# Altium PCB PCB1.PcbDoc
Units mil, origin at the board's own origin, x right, y up, seen from the top; angles counter-clockwise.
Board outline 5100 x 600 mil, 4 copper layers (Top Layer, GND, VCC, Bottom Layer), stack 23.756 mil thick; 26 components, 23 nets, 106 pads, 35 vias.
Unrouted connection lines stored in the file: 5.
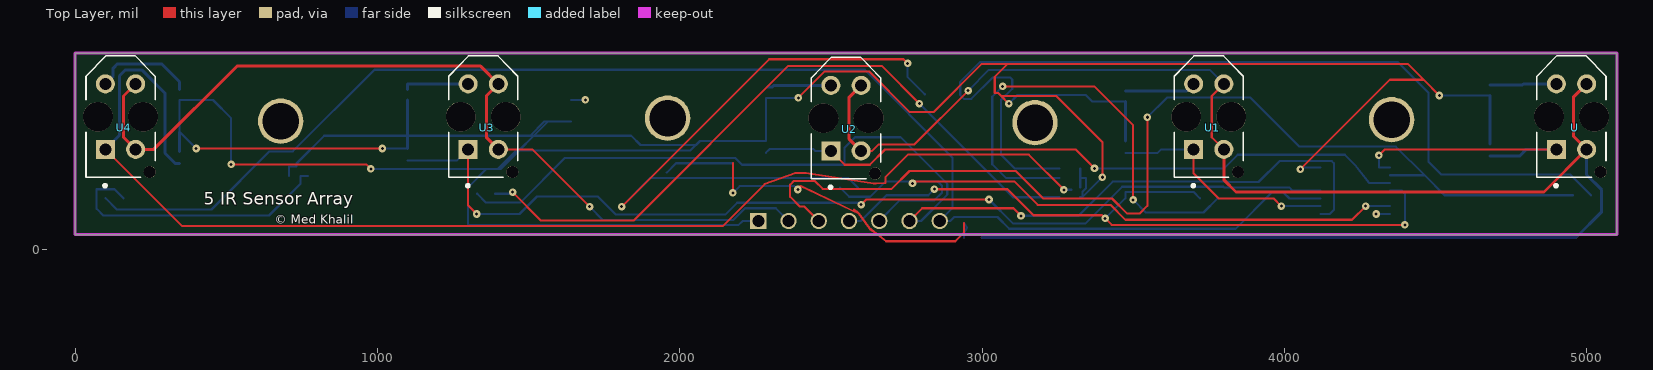
[diagram p0: Top Layer view]
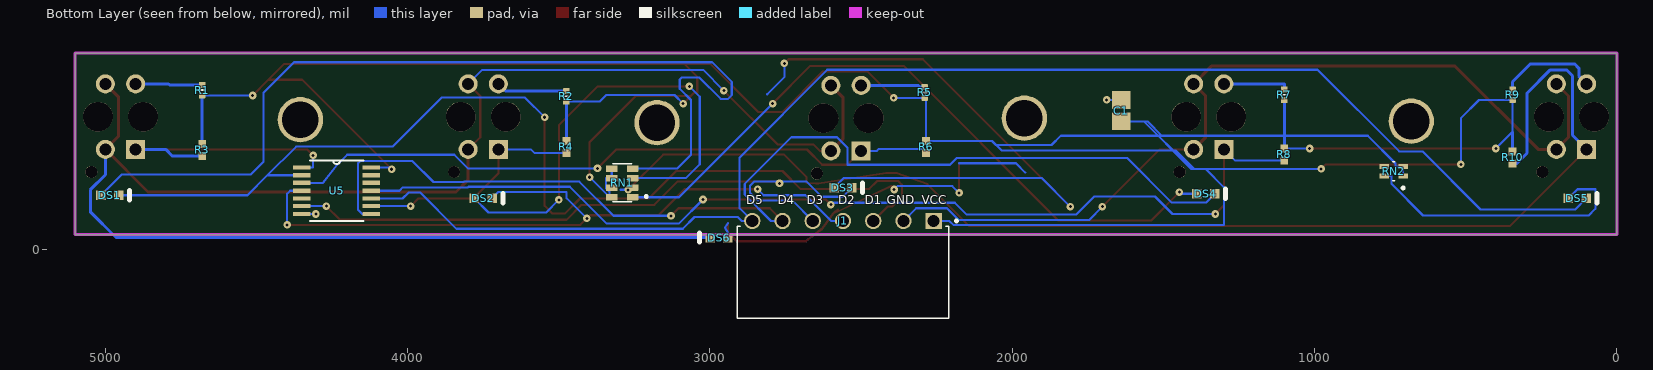
[diagram p1: Bottom Layer view, seen from below]
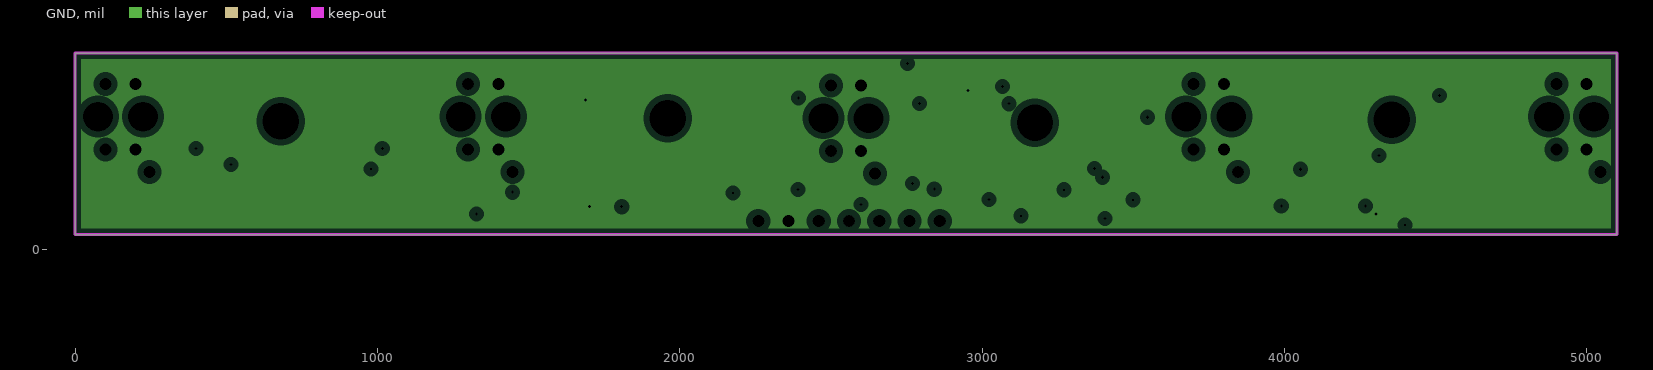
[diagram p2: GND, clearances drawn from the general rule]
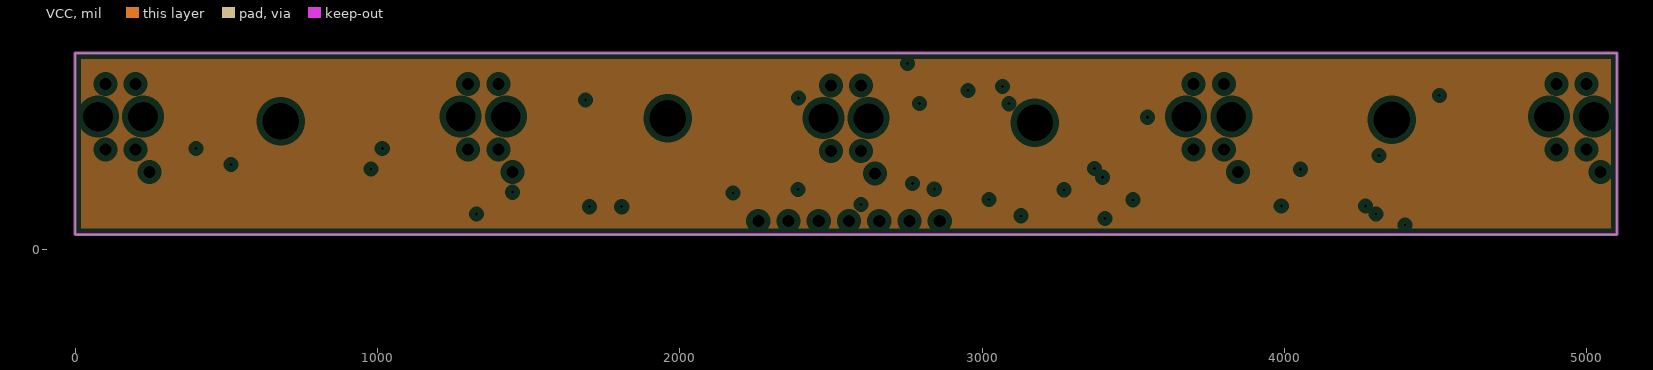
[diagram p3: VCC, clearances drawn from the general rule]
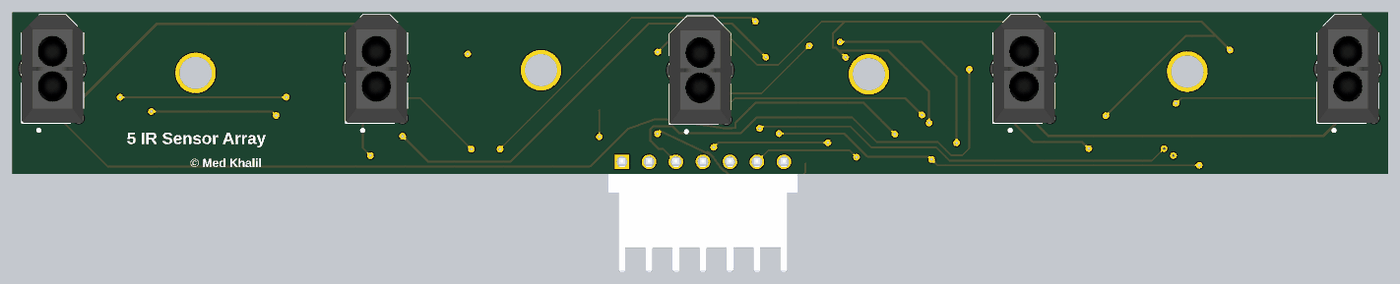
[diagram p4: 3D render of the assembled board from above, using the file's embedded part models]
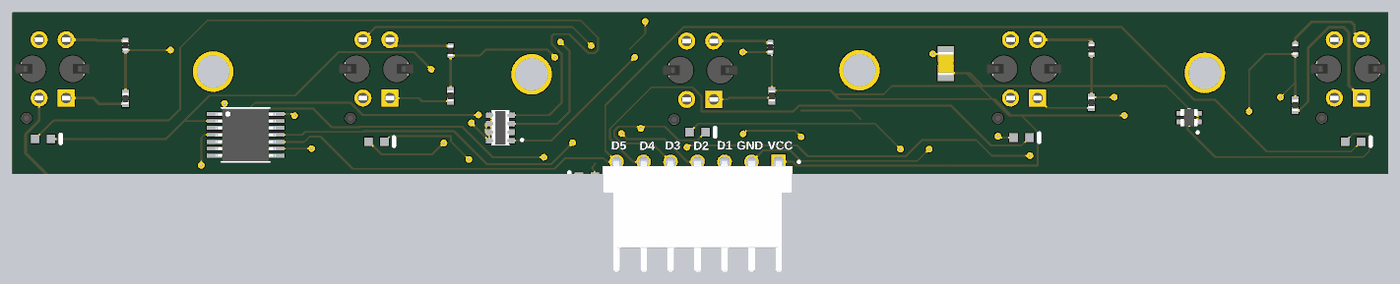
[diagram p5: 3D render of the assembled board from below, using the file's embedded part models]

## Layer stack, top to bottom
Top Solder: solder mask 0.4, Solder Resist, Dk 3.5
Top Layer: signal copper 1.4
Dielectric 2: prepreg 2.8, PP-006, Dk 4.1
GND: plane copper 1.378, net GND
Dielectric 1: dielectric 12.6, FR-4, Dk 4.8
VCC: plane copper 1.378
Dielectric 3: prepreg 2.8, PP-006, Dk 4.1
Bottom Layer: signal copper 1.4
Bottom Solder: solder mask 0.4, Solder Resist, Dk 3.5

## Board outline
0,50 0,650 5100,650 5100,50

## Design rules (kind name [scope] priority, off if disabled: settings)
Clearance [All] p1: gap=10 ignorepadtopadclearanceinfootprint=FALSE
PlaneClearance [All] p1: clearance=20
PlaneConnect [All] p1: planeconnectstyle=Relief reliefexpansion=20 reliefentries=4 reliefconductorwidth=10 reliefairgap=10
PolygonConnect [All] p1: connectstyle=Relief reliefconductorwidth=10 reliefentries=4 polygonreliefangle="90 Angle" airgapwidth=10
RoutingVias [All] p1: holewidth=10 width=25 viastyle="Through Hole" minholewidth=10 minwidth=25 maxholewidth=10 maxwidth=25
SolderMaskExpansion [All] p1: expansion=4 istentingtop=FALSE
SupplyNets "Schematic Supply Nets_1" [InNet('GND')] p1: voltage=0.000
SupplyNets "Schematic Supply Nets" [InNet('VCC')] p2: voltage=0.000
Width [All] p1: maxlimit=7 minlimit=7 preferedwidth=7 minimp=50.000000 maximp=50.000000 favimp=50.000000
28 further rules are at their usual default settings.

## Components (designator, comment, footprint, x,y, rotation, side; value= is the part's Value field where it differs from the comment)
C1 "Capacitor 1 uF +/- 10% 25 V 0805" CAPC2013X145X50ML20T25 1640,460 r270 bottom value=1µF
DS1 "HSMG-C190" AVAG-HSMX-C190_V 4985,180 r180 bottom
DS2 "HSMG-C190" AVAG-HSMX-C190_V 3750,170 r180 bottom
DS3 "HSMG-C190" AVAG-HSMX-C190_V 2560,205 r180 bottom
DS4 "HSMG-C190" AVAG-HSMX-C190_V 1359.53,185 r180 bottom
DS5 "HSMG-C190" AVAG-HSMX-C190_V 130.47,170 r180 bottom
DS6 "HSMG-C190" AVAG-HSMX-C190_V 2970,40 r0 bottom
J1 "640457-7" TE_640457-7 2260,95 r0 bottom (schematic designator J?)
R1 "Resistor 100R +/-1 % 0402 63 mW" RESC0402(1005)_L 4680,527.72 r90 bottom value=100
R2 "Resistor 100R +/-1 % 0402 63 mW" RESC0402(1005)_L 3475,507.28 r90 bottom value=100
R3 "Resistor 100k +/-1% 0402 63 mW" RESC1005X40X25ML05T05 4680,329.68 r90 bottom value=100k
R4 "Resistor 100k +/-1% 0402 63 mW" RESC1005X40X25ML05T05 3475,339.68 r90 bottom value=100k
R5 "Resistor 100R +/-1 % 0402 63 mW" RESC0402(1005)_L 2290,520 r90 bottom value=100
R6 "Resistor 100k +/-1% 0402 63 mW" RESC1005X40X25ML05T05 2285,339.68 r90 bottom value=100k
R7 "Resistor 100R +/-1 % 0402 63 mW" RESC0402(1005)_L 1100,512.28 r90 bottom value=100
R8 "Resistor 100k +/-1% 0402 63 mW" RESC1005X40X25ML05T05 1100,315 r90 bottom value=100k
R9 "Resistor 100R +/-1 % 0402 63 mW" RESC0402(1005)_L 345,512.72 r90 bottom value=100
R10 "Resistor 100k +/-1% 0402 63 mW" RESC1005X40X25ML05T05 345,305 r90 bottom value=100k
RN1 "742C083561JP" RESCAV80P320X160X70-8N 3290.55,220.75 r90 bottom
RN2 "EXB-U346R2JV" RESCAXE_EXB-U346R2JV 738.5,259.25 r90 bottom
U "TCRT5000L" XDCR_TCRT5000L 4950,440 r90 top
U1 "TCRT5000L" XDCR_TCRT5000L 3750,440 r90 top
U2 "TCRT5000L" XDCR_TCRT5000L 2550,435 r90 top
U3 "TCRT5000L" XDCR_TCRT5000L 1350,440 r90 top
U4 "TCRT5000L" XDCR_TCRT5000L 150,440 r90 top
U5 "74HC14PW,112" SOP65P640X110-14N 4235,195 r180 bottom

## Footprints (in the part's own frame and the unit in brackets; to place one, negate y for a bottom-side part, rotate by r counter-clockwise, add the part's x,y. Pads: shape width x height; smd on the part's side, far side on the other; paste and mask are expansions set on the pad)
AVAG-HSMX-C190_V [mm] "SMD, 2-Leads, Body 1.6x0.8mm, Height 0.9mm"
  rect 0.8x0.8 smd: 1(-0.75,0) 2(0.75,0)
  silkscreen extent 1.65,-0.4 1.65,0.4, body extent -0.8,-0.4 0.8,0.4, height 0.9
CAPC2013X145X50ML20T25 [mm] "Chip Capacitor, 2-Leads, Body 2.2x1.45mm, IPC Low Density"
  rect 1.5x1.55 smd: 1(-0.9,0) 2(0.9,0)
  body extent -1.1,-0.72 1.1,0.73, height 1.45
RESC0402(1005)_L [mm] "Chip Resistor, Body 1.0x0.5mm, IPC High Density"
  rrect25% 0.5x0.55 smd: 1(-0.45,0) 2(0.45,0)
  silkscreen extent 0,-0.2 0,0.2, body extent -0.5,-0.25 0.5,0.25, height 0.3
RESC1005X40X25ML05T05 [mm] "Chip Resistor, 2-Leads, Body 1.05x0.55mm, IPC Low Density"
  rect 0.65x0.65 smd: 1(-0.5,0) 2(0.5,0)
  body extent -0.53,-0.28 0.53,0.28, height 0.4
RESCAV80P320X160X70-8N [mm]
  rrect13% 0.53x0.97 smd: 1(-1.2,-0.875) 2(-0.4,-0.875) 3(0.4,-0.875) 4(1.2,-0.875) 5(1.2,0.875) 6(0.4,0.875) 7(-0.4,0.875) 8(-1.2,0.875)
  silkscreen extent -1.6,-2.13 1.6,0.8, body extent -1.6,-0.8 1.6,0.8, height 0.7
RESCAXE_EXB-U346R2JV [mm]
  rect 0.45x0.8 smd: 1(-0.4,-0.8) 2(0.4,-0.8) 3(0.4,0.8) 4(-0.4,0.8)
  silkscreen extent -1.5,-0.9 0.8,0.09, body extent -0.8,-0.8 0.8,0.8, height 0.6
SOP65P640X110-14N [mil]
  rect 58x14 smd: 1(-115,77) 2(-115,51) 3(-115,26) 4(-115,0) 5(-115,-26) 6(-115,-51) 7(-115,-77) 8(115,-77) 9(115,-51) 10(115,-26) 11(115,0) 12(115,26) 13(115,51) 14(115,77)
  silkscreen extent -89,-100 89,100, body extent -126,-98 126,98, height 38
TE_640457-7 [mm]
  rect 1.37x1.37 hole 1.02: 1(0,0)
  round 1.37 hole 1.02: 2(2.54,0) 3(5.08,0) 4(7.62,0) 5(10.16,0) 6(12.7,0) 7(15.24,0)
  silkscreen extent -2.02,-0.1 16.51,8.19, body extent -1.27,-0.38 16.51,10.43, height 6.11
XDCR_TCRT5000L [mm]
  rect 1.6x1.6 hole 1: 1(-2.75,1.27)
  round 1.6 hole 1: 2(-2.75,-1.27) 3(2.75,-1.27) 4(2.75,1.27)
  round 1 hole 1 unplated: ""(-4.65,-2.45)
  round 2.5 hole 2.5 unplated: ""(0,1.9) ""(0,-1.9)
  silkscreen extent -5.92,-2.9 5.1,2.9, body extent -5.1,-3.5 5.1,3.5, height 6.71

## Part data
C1: library part CMP-001-00010-6, "Chip Capacitor, 1 uF, +/-10%, 25 V, 0805 (2012 Metric)", Capacitor Type=Ceramic, Case/Package=0805, Max Operating Temperature=125°C, Min Operating Temperature=-55°C, Tolerance=10%, Voltage Rating=25V, Mounting Technology=SM, Pins=2, RoHS Compliant=True
DS1 DS2 DS3 DS4 DS5 DS6: library part CMP-007-00013-2, "LED Uni-Color Green, 52 mW, 20 mA, -40 to 85 degC, 2-Pin SMD, RoHS, Tape and Reel", Case/Package=0603, Colour=Green, Forward Current=20mA, Forward Voltage=2.2V, Manufacturer=Avago, Max Operating Temperature=85°C, Min Operating Temperature=-40°C, Package Description="2-Pin Surface Mount Device, Body 1.6 x 0.8 mm, Height 0.9 mm", Package Quantity=4000, Package Reference=HSMX-C190, Power=52mW, Datasheet URL=http://docs.avagotech.com/docs/AV02-0551EN, Datasheet Version=Mar-12, Illumination Colour=Green, Lens Style=Diffused, Luminous Intensity=15mcd, Manufacturer URL=http://www.avagotech.com/, Mounting Technology=SM, Nominal Vf=2.2V, Packaging=TapeandReel, Pins=2, RoHS Compliant=True, Viewing Angle=170degrees
J1: "07P MTA100 HDR ASSY SQ R/A F/L", Package=None, Availability=Good, Centerline_Pitch="2.54 mm[.1 in]", Check_prices=https://www.snapeda.com/parts/640457-7/TE%20Connectivity%20AMP%20Connectors/view-part/554536/?ref=eda, EU_RoHS_Compliance=Compliant, MF="TE Connectivity", MP=640457-7, Number_of_Positions=7, Price=None, Product_Type=Connector, Purchase-URL=https://pricing.snapeda.com/search/part/640457-7/?ref=eda, SnapEDA_Link=https://www.snapeda.com/parts/640457-7/TE%20Connectivity%20AMP%20Connectors/view-part/554536/?ref=snap
R1 R2 R5 R7 R9: library part CMP-009-00167-3, "Chip Resistor, 100 Ohms, +/-1 %, 63 mW, -55 to 155 degC, 0402", Case/Package=0402, Max Operating Temperature=155°C, Min Operating Temperature=-55°C, Power=63mW, Tolerance=1%, Pins=2
R3 R4 R6 R8 R10: library part CMP-009-00021-5, "Chip Resistor, 100 KOhm, +/- 1%, 0.063 W, -55 to 155 degC, 0402 (1005 Metric)", Case/Package=0402, Max Operating Temperature=155°C, Min Operating Temperature=-55°C, Power=63mW, Tolerance=1%, Voltage Rating=50V, Mounting Technology=SM, Pins=2, RoHS Compliant=True
RN1: "560 Ohm Â±5% 62.5mW Power Per Element Isolated Resistor Network/Array Â±200ppm/Â°C 1206 (3216 Metric), Concave, Long Side Terminals", Package="1206 CTS Resistor", Check_prices=https://www.snapeda.com/parts/742C083561JP/CTS+Components/view-part/?ref=eda, MF="CTS Resistor", MP=742C083561JP, SnapEDA_Link=https://www.snapeda.com/parts/742C083561JP/CTS+Components/view-part/?ref=snap
RN2: "Series/Type: Anti-Sulfurated Chip Resistor Array, Power Rating (W): 0.063, Chip Size (LxW) (mm): 1.6 X 1.6, Resistance Values (â„", Package="NON STANDARD-4 Panasonic", Check_prices=https://www.snapeda.com/parts/EXB-U346R2JV/Panasonic/view-part/?ref=eda, MF=Panasonic, MP=EXB-U346R2JV, SnapEDA_Link=https://www.snapeda.com/parts/EXB-U346R2JV/Panasonic/view-part/?ref=snap
U U1 U2 U3 U4: "Reflective Optical Sensor 0.591 _15mm_ PCB Mount", Package="PCB Mount Vishay Semiconductor", Availability=Unavailable, MF=Vishay, MP=TCRT5000L, Price=None, SnapEDA_Link=https://www.snapeda.com/parts/TCRT5000L/Vishay%20Semiconductor%20Opto%20Division/view-part/229608/?ref=snap
U5: "Inverter IC 6 Channel Schmitt Trigger 14-TSSOP", Package="TSSOP14-14 Nexperia USA Inc.", Availability=Good, Check_prices=https://www.snapeda.com/parts/74HC14PW,112/Nexperia/view-part/1039907/?ref=eda, MF=Nexperia, MP=74HC14PW,112, Price=None, Purchase-URL=https://pricing.snapeda.com/search/part/74HC14PW,112/?ref=eda, SnapEDA_Link=https://www.snapeda.com/parts/74HC14PW,112/Nexperia/view-part/1039907/?ref=snap

## Free pads (board coordinates)
  round 150 hole 120: 5(680,425) 5(1960,435) 5(3175,420) 5(4355,430)

## Via types
v1: diameter 25, hole 10, Top Layer to Bottom Layer, 35 vias

## Nets (pads, with @x,y where several pads share a name; then routed paths per layer and width w, separated by ;. In a path a pad name is that pad's centre, name@x,y a point inside that pad or via, vN(x,y) a via of type N, cw(c..) or ccw(c..) an arc to the next point about the centre after c; other vN are vias at no path point)
A1: R3.1 U5.1 U.1 | length 901
  Top Layer w7: v1(4313,311.73) 4333,331.73 U.1
  Bottom Layer w7: v1(4313,311.73) 4313,272 U5.1
  Bottom Layer w10: R3.1 4779,310 4800.73,331.73 U.1
A2: R6.1 U2.1 U5.3 | length 2200.3
  Top Layer w7: U2.1 2545.73,281 2628.75,281 2679.25,331.5 3309.5,331.5 v1(3372,269)
  Bottom Layer w7: R6.1 2298,333 2442,333 2448.27,326.73 U2.1 ; v1(3372,269) 3800.9,269 3845.9,314 4200,314 4235,279 4280,221 U5.3
A3: R10.1 U4.1 U5.5 | length 4185.8
  Top Layer w7: U4.1 353.73,78 2142,78 2280.69,216.69 2382.19,253 2417.81,253 2641.49,219.12 ; 2648.48,218.81 cw(c2646.46,251.93) 2641.49,219.12 ; v1(3271,198) 3154.5,314.5 2754.62,314.5 2681.05,240.93 2681.05,220.79 2678.4,220.63 2641.49,219.12
  Bottom Layer w7: v1(3271,198) 3295,198
  Bottom Layer w10: U4.1 147,378.73 147,575 166.76,594.76 220,594.76 297,517.76 297,319 330.68,285.32 R10.1
A4: R4.1 U1.1 U5.9 | length 774.3
  Top Layer w7: U1.1 3700,252 3783,169 3965,169 v1(3990,144)
  Bottom Layer w7: R4.1 3581,320 3592.73,331.73 U1.1 ; v1(3990,144) U5.9
A5: R8.1 U3.1 U5.11 | length 3396
  Top Layer w7: U3.1 1300,146 v1(1328,118) ; v1(2600,149) 2617,166 v1(3023,166)
  Bottom Layer w7: R8.1 1263.58,295.32 U3.1 ; v1(1328,118) 1470,118 1528,176 1729,176 1789,116 2151,116 2190,155 2594,155 v1(2600,149) ; v1(3023,166) 3103,86 3341.53,86 3463.53,208 3798,208 3800,206 4016,206 4027,195 U5.11
D1: DS1.2 J1.3 U5.2 | length 3435.7
  Top Layer w7: J1.3 2412,143 2397,143 2365,175 2365,215 2377,227 2447,227 2473,201 2701,201 2760,260 3112,260 3203,169 3430,169 3480,119 3521,119 3547,145 v1(3547,438)
  Bottom Layer w7: v1(3547,438) 3612,503 3888,503 4050,341 4369,341 4464,246 ; U5.2 4464,246 ; DS1.2 4530,180 4464,246
D2: DS2.2 J1.4 U5.4 | length 2457.6
  Top Layer w7: v1(2842,200) 3084.37,200 3170.37,114 3397,114 v1(3407.38,103.62) 3429.04,81.96 v1(4398.96,81.96)
  Bottom Layer w7: J1.4 2599,95 2684,180 2822,180 v1(2842,200) ; v1(3407.38,103.62) 3474,170.23 3474,191 3699.47,191 DS2.2 ; U5.4 4388.96,195 4398.96,185 v1(4398.96,81.96)
D3: DS3.2 J1.5 U5.6 | length 2307.1
  Top Layer w7: v1(2770,219) 2777,226 3106.34,226 3184.34,148 3425,148 3474,99 4224,99 v1(4269,144)
  Bottom Layer w7: DS3.2 2560.47,175 2630,175 2681,226 v1@2770,226 ; J1.5 2728,163 2841.77,163 2868,189.23 2868,210.77 2852.77,226 v1@2770,226 ; v1(2770,219) v1@2770,226 ; v1(4269,144) U5.6
D4: DS4.2 J1.6 U5.8 | length 3683.7
  Top Layer w7: J1.6 2802,137 3104,137 v1(3129,112)
  Bottom Layer w7: DS4.2 1359.25,155.75 1472.75,155.75 1620,303 2184,303 2206,281 2545,281 2545,337 2580,372 2730.81,372 2885,217.81 2885,182 2798,95 J1.6 ; v1(3129,112) 3319,112 3432,225 3813.74,225 3815,223.74 3914.74,223.74 3984,293 4157,293 4165,285 4165,133 4150,118 U5.8
D5: DS5.2 J1.7 U5.10 | length 4694.8
  Bottom Layer w7: DS5.2 137.94,133 451,133 643,325 720,325 990,595 2612,595 2902,305 2902,137 J1.7 2895,95 2908,108 3051,108 3090,69 3839.01,69 3959.01,189 3997,189 4017,169 U5.10
GND: C1.1 DS6.2 J1.2 U1.2 U1.3 U2.2 U2.3 U3.2 U3.3 U4.2 U4.3 U5.7 U.2 U.3 | length 8794.2
  Top Layer w7: U3.2 1512.27,331.73 v1(1702,142) ; U2.2 2636.34,326.73 2658.11,348.5 2776.5,348.5 v1(2954,526) ; U1.2 3760,371.73 3760,508.27 U1.3
  Top Layer w10: U4.3 160,508.27 160,371.73 U4.2 260.23,331.73 535.5,607 1341.27,607 U3.3 1360,508.27 1360,371.73 U3.2 ; U2.2 2559.41,367.32 2559.41,502.68 U2.3 ; U1.2 3800,231 3840,191 4859.27,191 U.2 4956,375.73 4956,504.27 U.3
  Bottom Layer w7: C1.1 v1(1688.01,495.43) ; v1(1702,142) 1745.86,98.14 2177.17,98.14 2216,136.97 2318.03,136.97 J1.2 ; v1(2954,526) 3022.76,594.76 3753.5,594.76 U1.3 ; v1(4303.5,118) U5.7
  Bottom Layer w10: DS6.2 4965,40 5050,125 5050,198 5000,248 U.2
NetDS1_1: DS1.1 RN1.4 | length 3158.4
  Bottom Layer w7: RN1.4 3109,267.99 3062.76,314.24 3062.76,495 3100,532.24 3100,563 3093.97,569.03 3034.58,569.03 2964.55,499 2940,499 2928,511 2928,555 2993,620 4376,620 4477,519 4477,291 4520,248 4946.53,248 DS1.1
NetDS2_1: DS2.1 RN1.3 | length 1560.6
  Top Layer w7: v1(3068,540) 3371,540 3500,411 v1(3500,165)
  Bottom Layer w7: v1(3068,540) 3034,506 3034,282.5 3080,236.5 RN1.3 ; v1(3500,165) 3542,123 3732.52,123 DS2.1
NetDS3_1: DS3.1 RN1.2 | length 2113.2
  Top Layer w7: v1(1808,142) 2296,630 2740,630 v1(2754,616)
  Bottom Layer w7: v1(1808,142) 1903,237 2557.53,237 DS3.1 ; v1(2754,616) 2754,570.8 2810.55,514.25
NetDS4_1: DS4.1 RN1.1 | length 2300.1
  Top Layer w7: v1(1447,190) 1541,96 1847,96 2359,608 2668,608 v1(2793,483)
  Bottom Layer w7: DS4.1 1442,185 v1(1447,190) ; v1(2793,483) 3102.5,173.5 RN1.1
NetDS5_1: DS5.1 RN2.4 | length 944.1
  Bottom Layer w7: DS5.1 130,200 71,200 71,135 93,113 641,113 745,217 745,243.5 RN2.4
NetDS6_1: DS6.1 RN2.3 | length 1306.8
  Top Layer w7: 2175.75,285.75 2176,285.5 v1(2176,188) ; v1(2391,199) 2398.62,206.62 2398.62,210 2400,210 2592.75,118.77 ; 2576.37,132.01 cw(c2560,95) 2592.75,118.77 ; 2637.77,61.19 cw(c2660,95) 2627.25,71.23 ; 2940,87.51 2940,56 2912,28 2683,28 2627.25,71.23 ; 2592.75,118.77 2627.25,71.23
  Bottom Layer w7: 1956.5,254.75 1987.49,285.75 2175.75,285.75 ; v1(2176,188) 2198,210 2380,210 v1(2391,199) ; 2940,87.51 2950.86,72.41 2940.48,56.48 DS6.1
NetR1_2: R1.2 U.4 | length 221.2
  Bottom Layer w10: R1.2 4788,545.43 4790.83,548.27 U.4
NetR2_2: R2.2 U1.4 | length 234.6
  Bottom Layer w10: R2.2 3676.73,525 U1.4
NetR5_2: R5.2 U2.4 | length 212.3
  Bottom Layer w10: R5.2 2305,537.72 2310.55,543.27 U2.4
NetR7_2: R7.2 U3.4 | length 218.3
  Bottom Layer w10: R7.2 1100,548.27 U3.4
NetR9_2: R9.2 U4.4 | length 337.4
  Bottom Layer w10: U4.4 125.51,573.77 125.51,600.27 140,614.76 285.24,614.76 345,555 R9.2
VCC: C1.2 J1.1 R1.1 R2.1 R3.2 R4.2 R5.1 R6.2 R7.1 R8.2 R9.1 R10.2 RN1.5 RN1.6 RN1.7 RN1.8 RN2.1 RN2.2 U5.14 | length 11270.2
  Top Layer w7: v1(400,334.69) v1(1016,334.69) ; v1(516,282) 963.31,282 v1(978.31,267) ; v1(2392.52,502.28) 2480,589.76 2626,589.76 2760.76,455 2839.64,455 2999.4,614.76 3085.09,614.76 ; v1(3088.76,482.76) 3063.01,508.5 ; v1(3398,239.5) 3398,356 3245.5,508.5 3063.01,508.5 ; v1(4053,266) 4349,562 4461,562 ; v1(4513,510) 4461,562 ; 3063.01,508.5 3052.97,518.54 3042,518.54 3042,571.67 3085.09,614.76 ; 3085.09,614.76 4408.24,614.76 4461,562
  Bottom Layer w7: v1(400,334.69) 345,389.69 R9.1 456,495 516,435 v1(516,282) ; RN2.1 RN2.2 732,275 732,285 824,377 1100,377 1505,377 ; v1(978.31,267) 1360,267 ; v1(1016,334.69) R8.2 ; C1.2 1565.04,424.57 ; J1.1 2208,95 2194,81 1301,81 1300,82 1300,207 1360,267 ; v1(2392.52,502.28) R5.1 2285,502.28 R6.2 2068.37,359.37 ; v1(3088.76,482.76) 3117.52,511.52 3343.48,511.52 3365.43,489.57 R2.1 ; RN1.8 RN1.8@3331.93,173.5 ; RN1.7 RN1.6 ; RN1.5 RN1.6 ; v1(3398,239.5) 3332,173.5 RN1.8@3331.93,173.5 ; v1(4053,266) 4059,272 U5.14 ; v1(4513,510) R1.1 ; 1360,267 1398.9,267 ; 1398.9,267 1407.47,267 1468.47,328 ; 1398.9,267 1459.9,328 1468.47,328 ; 1468.47,328 2034.63,328 2052.63,346 ; 1468.47,328 1517.47,377 ; 1505,377 1517.47,377 ; 1505,377 1552.57,424.57 1565.04,424.57 ; 1517.47,377 1839,377 1870,346 2052.63,346 ; 1517.47,377 1565.04,424.57 ; 2052.63,346 2055,346 2068.37,359.37 ; 2052.63,346 2066,359.37 2068.37,359.37 ; RN1.6 3344,236.5 3344,202.57 3331.93,190.5 RN1.8@3331.93,173.5
  Bottom Layer w10: R10.2 345,389.69 ; R8.2 1100,377 R7.1 ; R4.2 R2.1 ; R3.2 R1.1
pads on no net: U1. U2. U3. U4. U5.12 U5.13 U.

## Polygon pours and split planes (outlines as drawn)
GND on GND (split plane): 5079.9,70.1 20.1,70.1 20.1,629.9 5079.9,629.9
no net on VCC (split plane): 5079.9,70.1 20.1,70.1 20.1,629.9 5079.9,629.9

## Keep-outs
Keep-Out Layer:
  the board outline again, w10

## Silkscreen, mask and mechanical layers (free items; w line width, h text height)
Top Overlay:
  text "5 IR Sensor Array" at 425,134.32 h70
  text "© Med Khalil" at 660,75.79 h50
Bottom Overlay:
  text "VCC" at 2300,140.55 h50
  text "GND" at 2415,140.6 h50
  text "D1" at 2488,141 h50
  text "D3" at 2680,140.6 h50
  text "D5" at 2880,140.6 h50
  text "D2" at 2575,140 h50
  text "D4" at 2775,140 h50